# Allegro board artificiall_eye_ver00_bk.brd
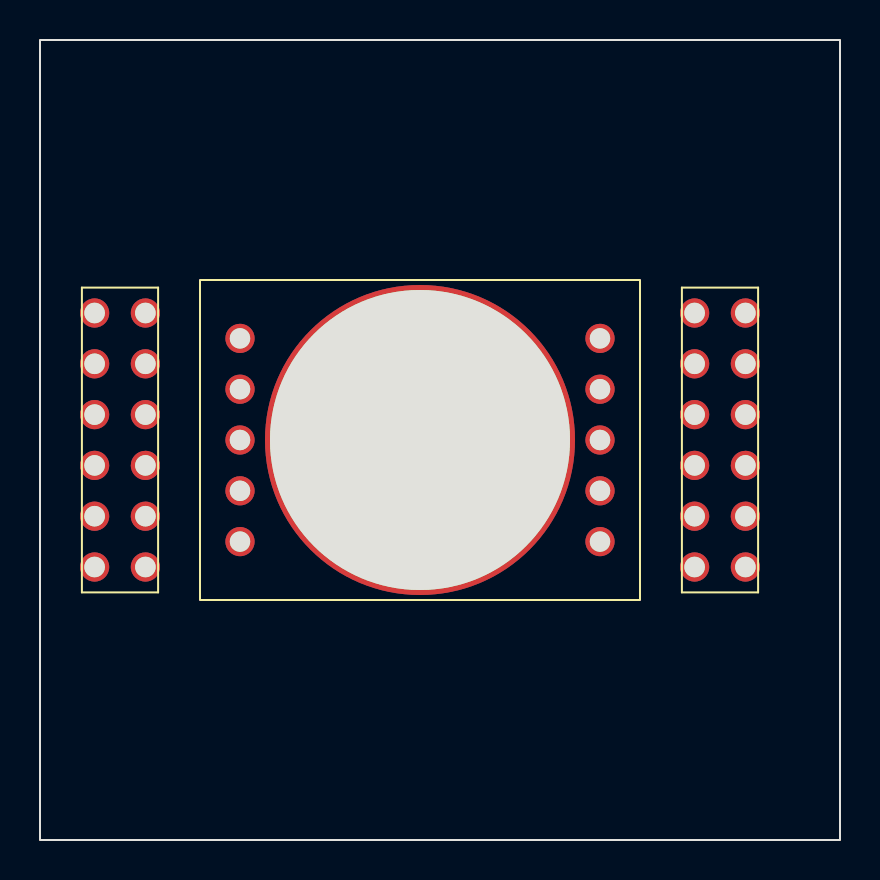
[diagram p0: board, top side]
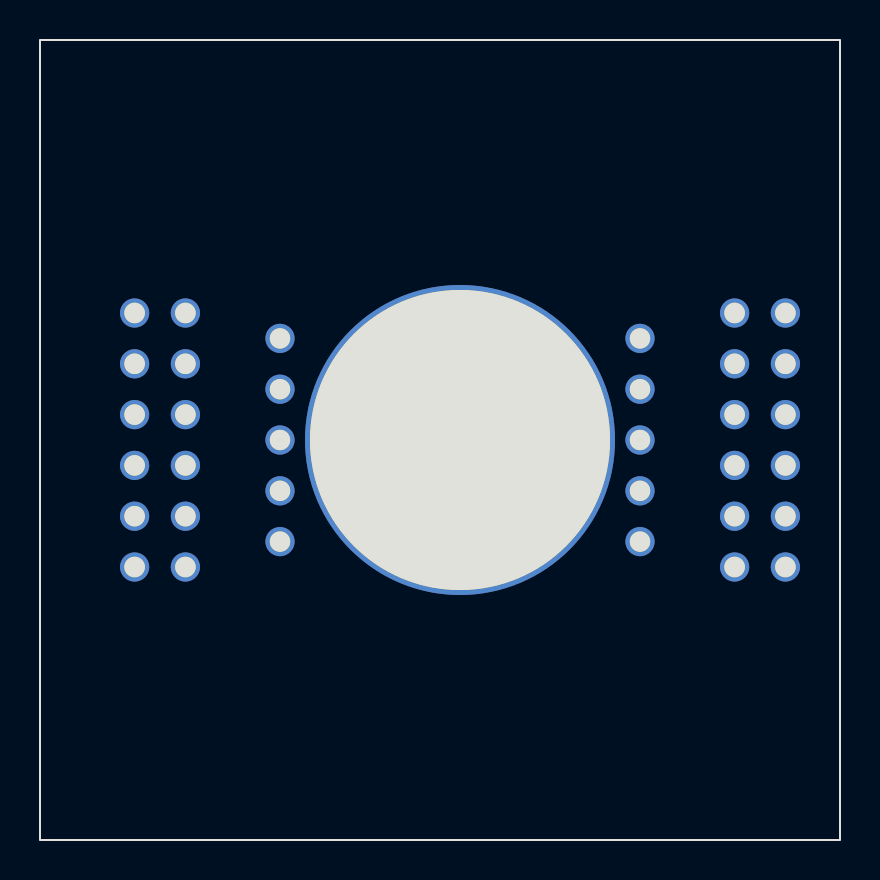
[diagram p1: board, bottom side, seen from below]

Outline 40 x 40 mm; copper layers: TOP, POWER, GROUND, BOTTOM. Coordinates in mm from the lower left corner of the outline.
Outline path: rectangle 0,0 40,40

## Design rules (mm)
nets with their own width: min track width 1; nets GND VCC

## Placement (name value [footprint] x y rotation side)
U1  header2x6  [HEADER2X6]  4 20 0 top
U2  header2x6  [HEADER2X6]  34 20 0 top
U3  Optic_nerve  [OPTICNERVE]  19 20 0 top

## Library data of the parts
U1 U2 = header2x6
U3 = Optic_nerve_0

## Footprints (pads in the part's own frame, mm; a bottom-side part is the same pattern mirrored in y, then rotated)
HEADER2X6
  round 1.46 hole 1.029: 1(-1.27,6.35) 2(-1.27,3.81) 3(-1.27,1.27) 4(-1.27,-1.27) 5(-1.27,-3.81) 6(-1.27,-6.35) 7(1.27,-6.35) 8(1.27,-3.81) 9(1.27,-1.27) 10(1.27,1.27) 11(1.27,3.81) 12(1.27,6.35)
OPTICNERVE
  round 15.5 hole 15 unplated: (0,0)
  round 1.46 hole 1.02: 1(-9,5.08) 2(-9,2.54) 3(-9,0) 4(-9,-2.54) 5(-9,-5.08) 6(9,-5.08) 7(9,-2.54) 8(9,0) 9(9,2.54) 10(9,5.08)

## Nets
GND: U2.6(P6)
VCC: U1.7(P7)
N00202: U1.12(P12) U2.5(P5)
N12915756: U1.9(P9) U3.1(INOUT1)
N12915771: U2.1(P1) U3.10(INOUT10)

Pads without a net: U1 1 2 3 4 5 6 8 10 11; U2 2 3 4 7 8 9 10 11 12; U3 2 3 4 5 6 7 8 9

## Routing (per net, layer and track width the routed paths; a pad name or vN(x,y) marks a point on that pad's centre or on a via; arc(x,y) is an arc through that point)
GND: length 3.6
  GROUND w1: 32.73,12.74 U2.6 ; U2.6 31.82,13.65 ; U2.6 32.73,14.56 ; U2.6 33.64,13.65
VCC: length 3.6
  POWER w1: U1.7 5.27,14.56 ; U1.7 4.36,13.65 ; U1.7 5.27,12.74 ; U1.7 6.18,13.65

## Copper pours and planes (outline as drawn; the poured copper is in the pictures)
GND on GROUND: 1,1 1,39 39,39 39,1
VCC on POWER: 1,1 1,39 39,39 39,1
